# EAGLE board V0p2_Main_PCB2.job (EAGLE 6.4)
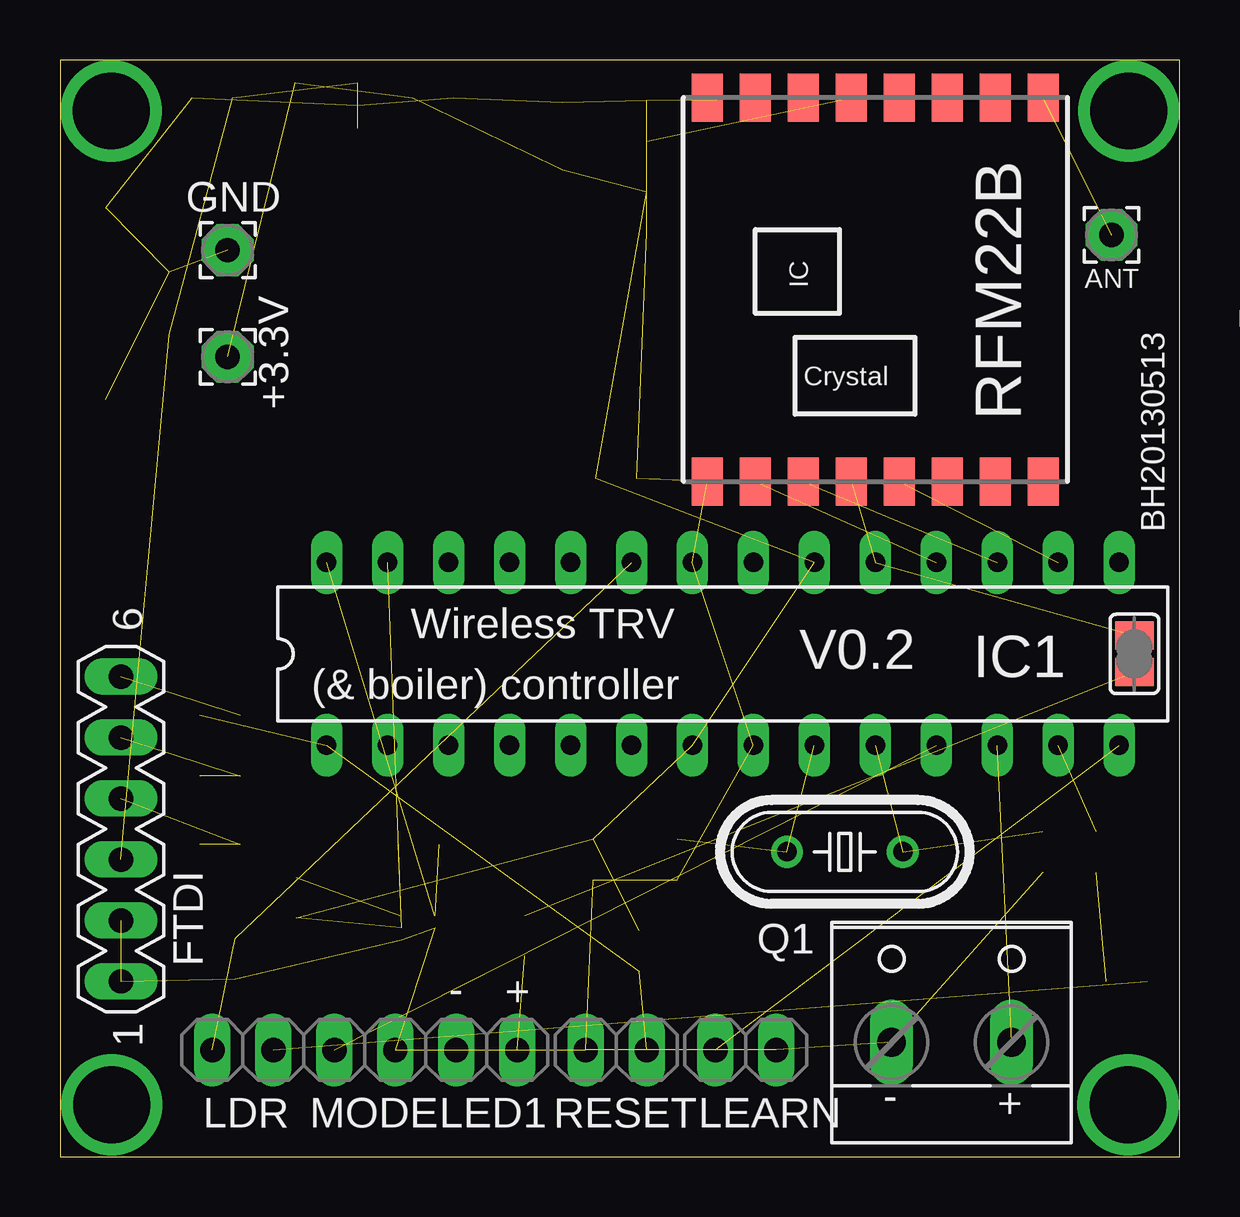
[diagram p0: board, top side]
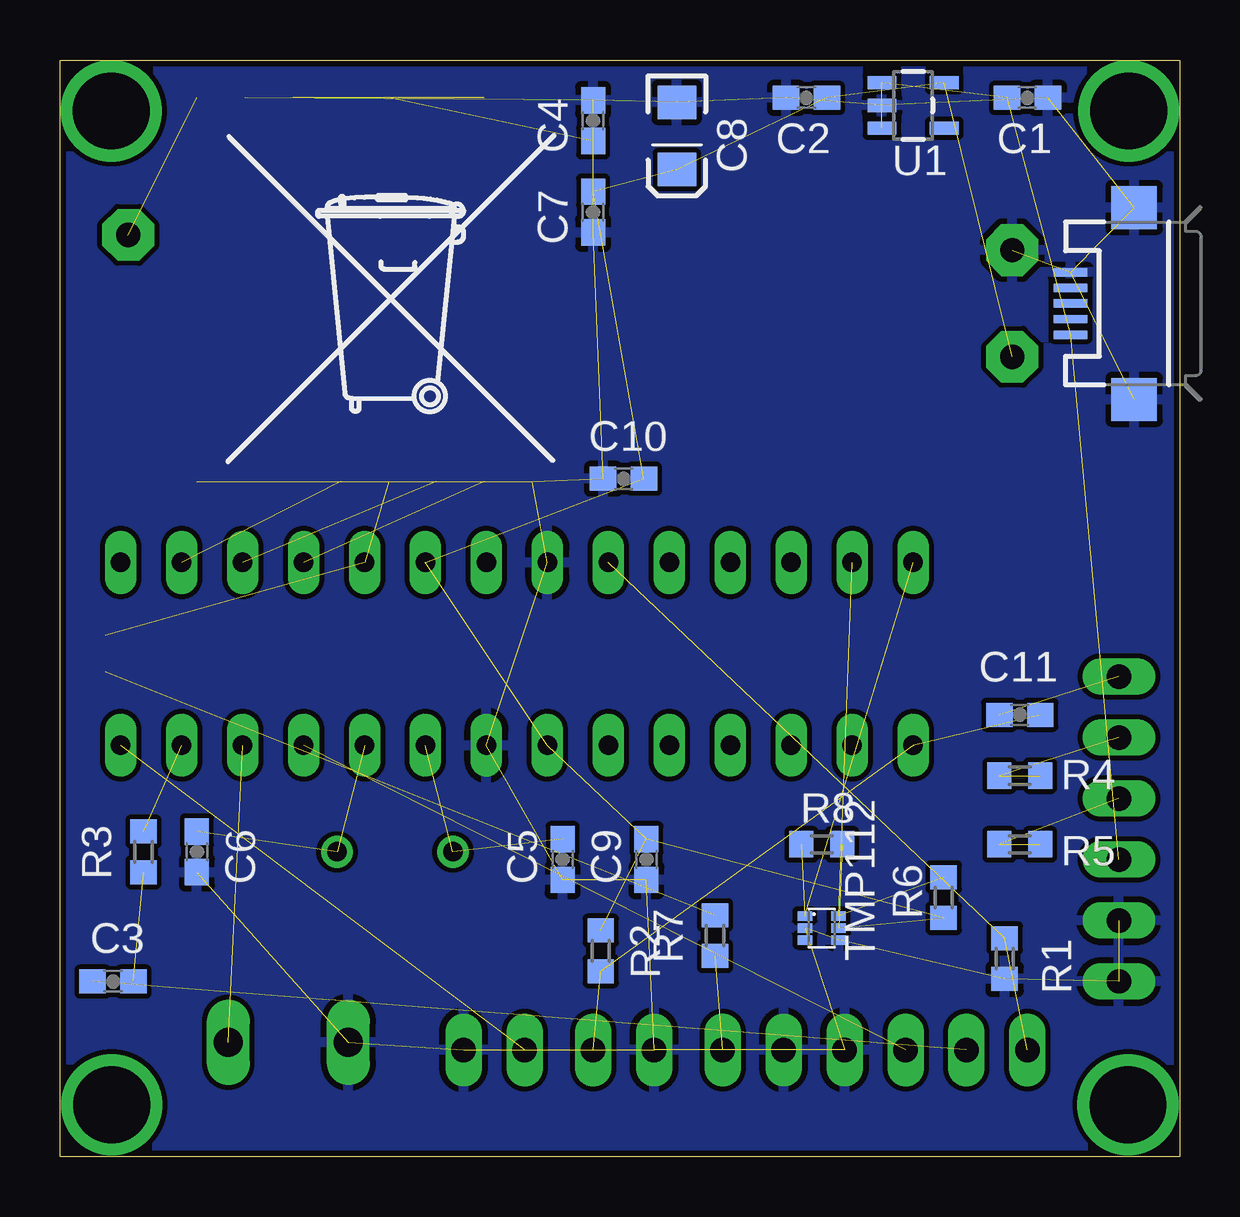
[diagram p1: board, bottom side, seen from below]

Size 46.66 x 45.71 mm. Coordinates in mm from the lower left corner, seen from the top.
Outline: 0,0 46.66,0 46.66,45.71 0,45.71 0,0
Copper layers (1*16): Top 0.035mm / dielectric 1.5mm / Bottom 0.035mm
Design rules "PMServicesStd": minimum track width 8mil, minimum drill 12mil, track to track 8mil, track to pad 8mil, pad to pad 8mil, via to via 8mil, smd to smd 0mil, copper to edge 10mil, drill to drill 10mil, minimum pad ring 10mil, minimum via ring 6mil, stop-mask expansion 2mil, vias tented up to drill 100mil, thermal gap 10mil

## Footprints (pad centres in the part's own frame; a part is rotated, then mirrored left to right if it is on the bottom)
USB-MICROB = smd 0.35 x 1.4: D+ 0,2.65; D- -0.65,2.65; GND 1.3,2.65; ID 0.65,2.65; VBUS -1.3,2.65 | smd 1.8 x 1.9: MT1 -4,0; MT2 4,0
2,15/1,0 = drill 1.016 pad 2.159 octagon: 1 0,0
W237-102 = drill 1.194 long: 1 -2.5,-1.27; 2 2.5,-1.27
0603-CAP = smd 1.1 x 1: 1 -0.85,0; 2 0.85,0
EIA3216 = smd 1.4 x 1.6: A 1.4,0; C -1.4,0
MA06-1 = drill 1.016 long: 1 -6.35,0; 2 -3.81,0; 3 -1.27,0; 4 1.27,0; 5 3.81,0; 6 6.35,0
DIL28-3 = drill 0.813 long: 1 -16.51,-3.81; 2 -13.97,-3.81; 3 -11.43,-3.81; 4 -8.89,-3.81; 5 -6.35,-3.81; 6 -3.81,-3.81; 7 -1.27,-3.81; 8 1.27,-3.81; 9 3.81,-3.81; 10 6.35,-3.81; 11 8.89,-3.81; 12 11.43,-3.81; 13 13.97,-3.81; 14 16.51,-3.81; 15 16.51,3.81; 16 13.97,3.81; 17 11.43,3.81; 18 8.89,3.81; 19 6.35,3.81; 20 3.81,3.81; 21 1.27,3.81; 22 -1.27,3.81; 23 -3.81,3.81; 24 -6.35,3.81; 25 -8.89,3.81; 26 -11.43,3.81; 27 -13.97,3.81; 28 -16.51,3.81
1X02 = drill 1.016 long: 1 -1.27,0; 2 1.27,0
HC49/S = drill 0.813: 1 -2.413,0; 2 2.413,0
R0603 = smd 1 x 1.1: 1 -0.85,0; 2 0.85,0
RFM22-XXX-S2 = smd 2 x 1.3: 1 -8,7; 2 -8,5; 3 -8,3; 4 -8,1; 5 -8,-1; 6 -8,-3; 7 -8,-5; 8 -8,-7; 9 8,-7; 10 8,-5; 11 8,-3; 12 8,-1; 13 8,1; 14 8,3; 15 8,5; 16 8,7
SJ = smd 1.168 x 1.6: 1 -0.762,0; 2 0.762,0
TMP112 = smd 0.4 x 0.6: 1 -0.5,-0.7; 2 0,-0.7; 3 0.5,-0.7; 4 0.5,0.7; 5 0,0.7; 6 -0.5,0.7
TC1185 = smd 0.55 x 1.2: 1 -0.95,-1.3; 2 0,-1.3; 3 0.95,-1.3; 4 0.95,1.3; 5 -0.95,1.3

## Placement (x,y rotation side)
5V  USB-MICROB  [USB-MICROB]  1.91,35.56 90 bottom
+3.3V  [2,15/1,0]  6.99,33.34 90 top
-  BOILER  [W237-102]  37.15,6.03 0 top
ANT  ANT (86 mm)  [2,15/1,0]  43.81,38.42 180 top
C1  10uF 10V  [0603-CAP]  6.35,44.13 0 bottom
C2  10uF 10V  [0603-CAP]  15.56,44.13 0 bottom
C3  100nF  [0603-CAP]  44.45,7.3 0 bottom
C4  100pF  [0603-CAP]  24.45,43.18 90 bottom
C5  0pF  [0603-CAP]  25.72,12.38 270 bottom
C6  0pF  [0603-CAP]  40.96,12.7 270 bottom
C7  100nF  [0603-CAP]  24.45,39.37 90 bottom
C8  100uF  [EIA3216]  20.95,42.55 270 bottom
C9  100nF  [0603-CAP]  22.23,12.38 270 bottom
C10  100nF  [0603-CAP]  23.18,28.26 180 bottom
C11  100nF  [0603-CAP]  6.67,18.41 180 bottom
FTDI  FTDI  [MA06-1]  2.54,13.65 90 top
GND  [2,15/1,0]  6.99,37.78 0 top
IC1  ATMEGA328P-PU  [DIL28-3]  27.62,20.95 0 top
LDR  [1X02]  7.62,4.45 0 top
LEARN  [1X02]  28.57,4.45 0 top
LED1  [1X02]  17.78,4.45 0 top
MODE  [1X02]  12.7,4.45 0 top
Q1  32768Hz  [HC49/S]  32.7,12.7 180 top
R1  100K  [R0603]  7.3,8.26 270 bottom
R2  10K  [R0603]  24.13,8.57 270 bottom
R3  330R  [R0603]  43.18,12.7 270 bottom
R4  10K  [R0603]  6.67,15.88 180 bottom
R5  10K  [R0603]  6.67,13.02 180 bottom
R6  4K7  [R0603]  9.84,10.79 90 bottom
R7  470R  [R0603]  19.37,9.21 270 bottom
R8  4K7  [R0603]  14.92,13.02 0 bottom
RESET  [1X02]  23.18,4.45 0 top
RFM22B  RFM22SMD  [RFM22-XXX-S2]  33.97,36.14 270 top
SJ1  [SJ]  44.77,20.95 270 top
TMP112  TMP112  [TMP112]  14.92,9.53 270 bottom
U1  TC1185SMD  [TC1185]  11.11,43.81 270 bottom
U$2  [TONNE]  33.02,33.02 0 bottom
U$3  [OSHW_6X200_NOTEXT]  49.21,32.7 0 top

## Library data of the parts
5V = SparkFun-Connectors
+3.3V ANT GND = wirepad
- = con-wago-500; MPN: 237-102; OC_FARNELL: unknown; OC_NEWARK: 70K9898
C1-C11 = SparkFun-Passives
FTDI = FTDI; OC_FARNELL: unknown; OC_NEWARK: unknown
IC1 = Arduino-AVR
LDR LEARN LED1 MODE RESET = pinhead
Q1 = crystal; OC_FARNELL: 1667008; OC_NEWARK: unknown
R1-R8 = resistor
RFM22B = SparkFun-RF
SJ1 = jumper
TMP112 = TMP112
U1 = 3.3VREG
U$2 = logo
U$3 = ohw-logo

## Nets
5V: 5V.VBUS C1.1 FTDI.3 U1.1 U1.3
BOILER: -.2 IC1.12
BUTTON_LEARN_L: IC1.14 LEARN.1
BUTTON_MODE_L: IC1.11 MODE.1
GND: 5V.GND 5V.MT1 5V.MT2 -.1 C1.2 C2.1 C4.2 C5.2 C6.2 C7.1 C8.C C9.2 C10.2 FTDI.1 FTDI.2 GND.1 IC1.8 IC1.22 LEARN.2 LED1.1 MODE.2 R1.2 RESET.1 RFM22B.2 RFM22B.9 RFM22B.15 RFM22B.16 TMP112.2 TMP112.4 U1.2
IO_POWER: C3.1 LDR.2
IO_POWER_UP: IC1.13 R3.1
LDR: IC1.23 LDR.1 R1.1
LED_HEATCALL: R7.1 SJ1.2
LEDEXT: LED1.2 R7.2
N$1: C11.2 FTDI.6
N$2: C3.2 R3.2
N$20: RFM22B.3 RFM22B.6
N$21: RFM22B.4 RFM22B.7
N$26: ANT.1 RFM22B.1
RESET: C11.1 IC1.1 R2.2 RESET.2
RX: FTDI.5 R4.1 R4.2
SCL: IC1.28 R8.1 TMP112.1
SDA: IC1.27 R6.2 TMP112.6
SPI_MISO: IC1.18 RFM22B.10
SPI_MOSI: IC1.17 RFM22B.11
SPI_NSS: IC1.16 RFM22B.13
SPI_SCK: IC1.19 RFM22B.12 SJ1.1
TX: FTDI.4 R5.1 R5.2
VCC: +3.3V.1 C2.2 C4.1 C7.2 C8.A C9.1 C10.1 IC1.7 IC1.20 R2.1 R6.1 R8.2 RFM22B.5 TMP112.5 U1.5
XTAL1: C5.1 IC1.9 Q1.2
XTAL2: C6.1 IC1.10 Q1.1

## Tracks (layer width: path | path; a pad name or v marks a point on that pad's centre or on a via)
5V  (4 unrouted)
BOILER  (1 unrouted)
BUTTON_LEARN_L  (1 unrouted)
BUTTON_MODE_L  (1 unrouted)
GND  (29 unrouted)
  pour Bottom: 0,45.72 0,0 46.67,0 46.67,45.72
IO_POWER  (1 unrouted)
IO_POWER_UP  (1 unrouted)
LDR  (2 unrouted)
LED_HEATCALL  (1 unrouted)
LEDEXT  (1 unrouted)
N$1  (1 unrouted)
N$2  (1 unrouted)
N$4  (via drill 3.2)
  other vias: 2.13,43.59
N$12  (via drill 3.2)
  other vias: 44.5,2.16
N$19  (via drill 3.2)
  other vias: 44.53,43.59
N$20  (1 unrouted)
N$21  (1 unrouted)
N$22  (via drill 3.2)
  other vias: 2.16,2.16
N$26  (1 unrouted)
RESET  (3 unrouted)
RX  (2 unrouted)
SCL  (2 unrouted)
SDA  (2 unrouted)
SPI_MISO  (1 unrouted)
SPI_MOSI  (1 unrouted)
SPI_NSS  (1 unrouted)
SPI_SCK  (2 unrouted)
TX  (2 unrouted)
VCC  (14 unrouted)
XTAL1  (2 unrouted)
XTAL2  (2 unrouted)

## Text on the board
tNames: BH20130513 | Wireless TRV | V0.2 | (& boiler) controller | - | + | - | +